# Altium PCB trace_8.PcbDoc
Units mil, origin at the board's own origin, x right, y up, seen from the top; angles counter-clockwise.
Board outline 2390 x 1760 mil, 2 copper layers (Top Layer, Bottom Layer); 2 components, 1 nets, 14 pads, 2 vias.
Unrouted connection lines stored in the file: 9.
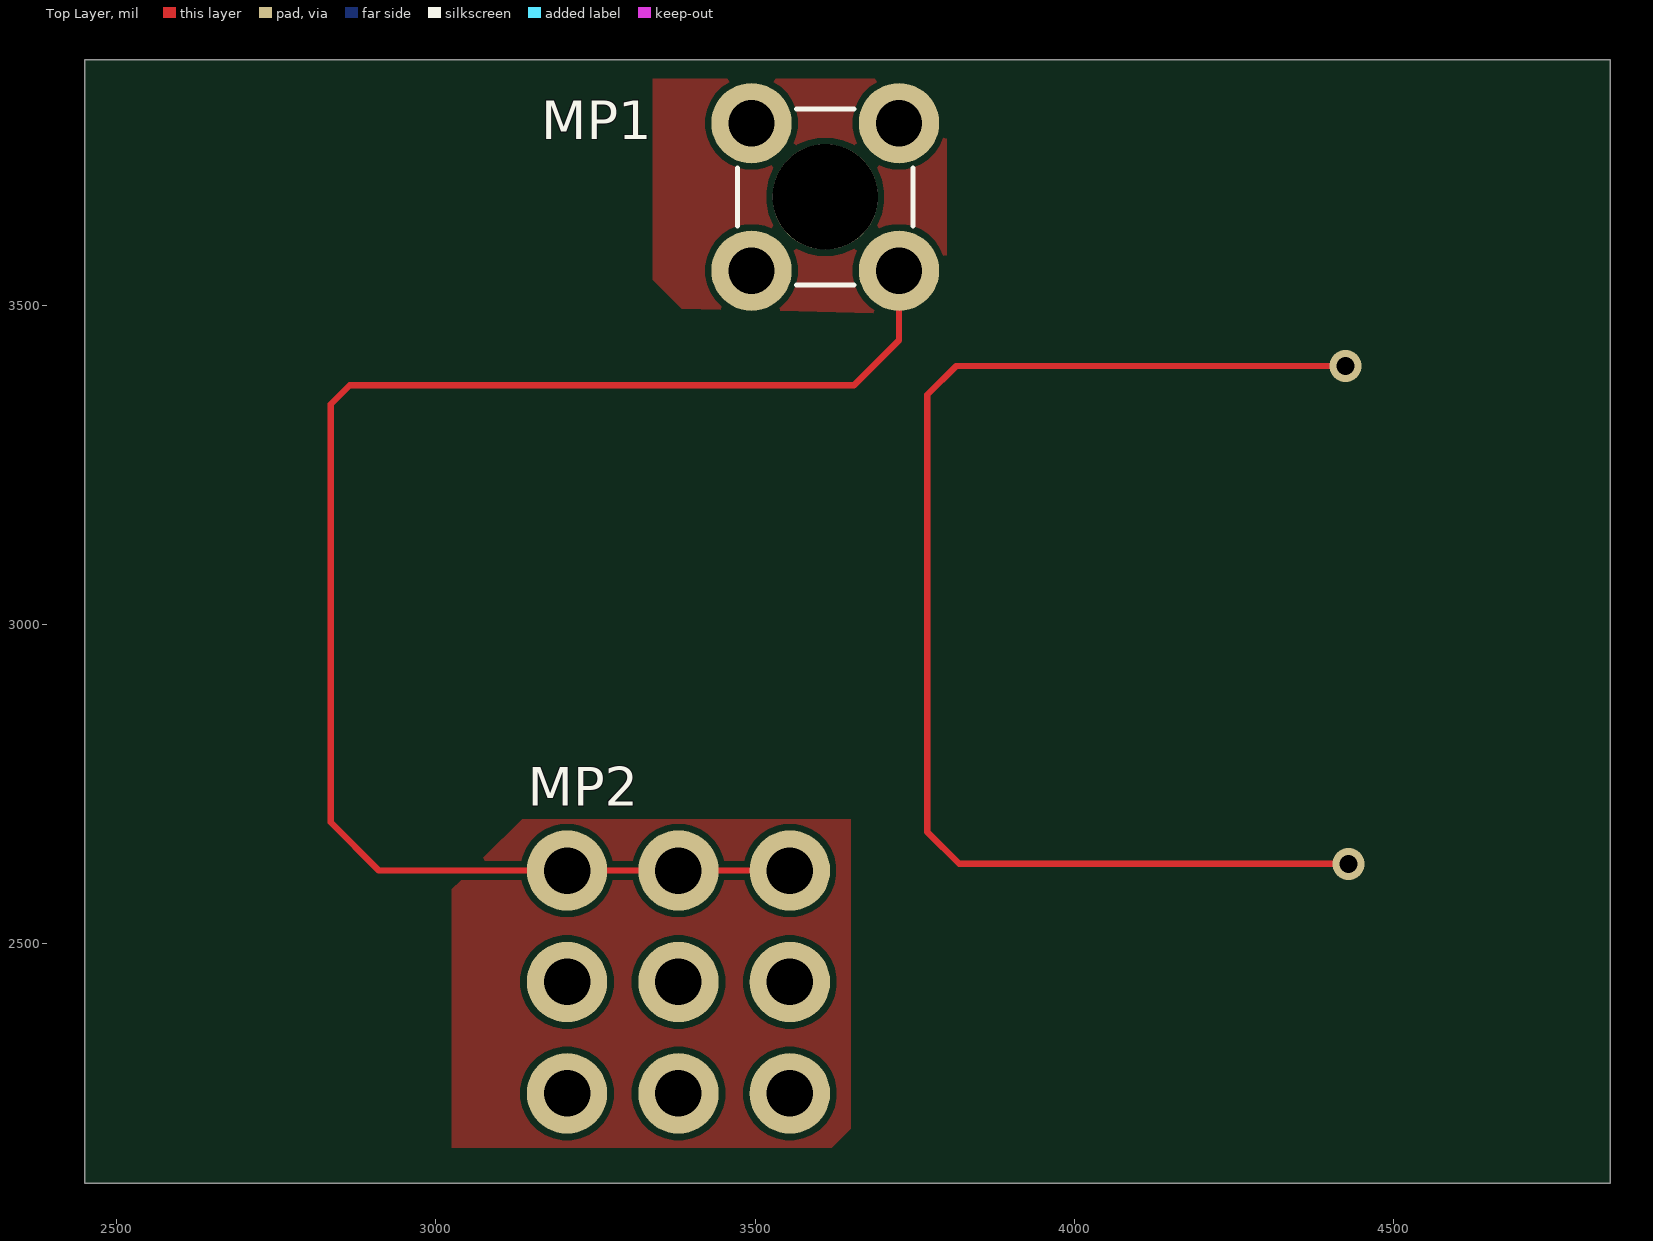
[diagram p0: Top Layer view]
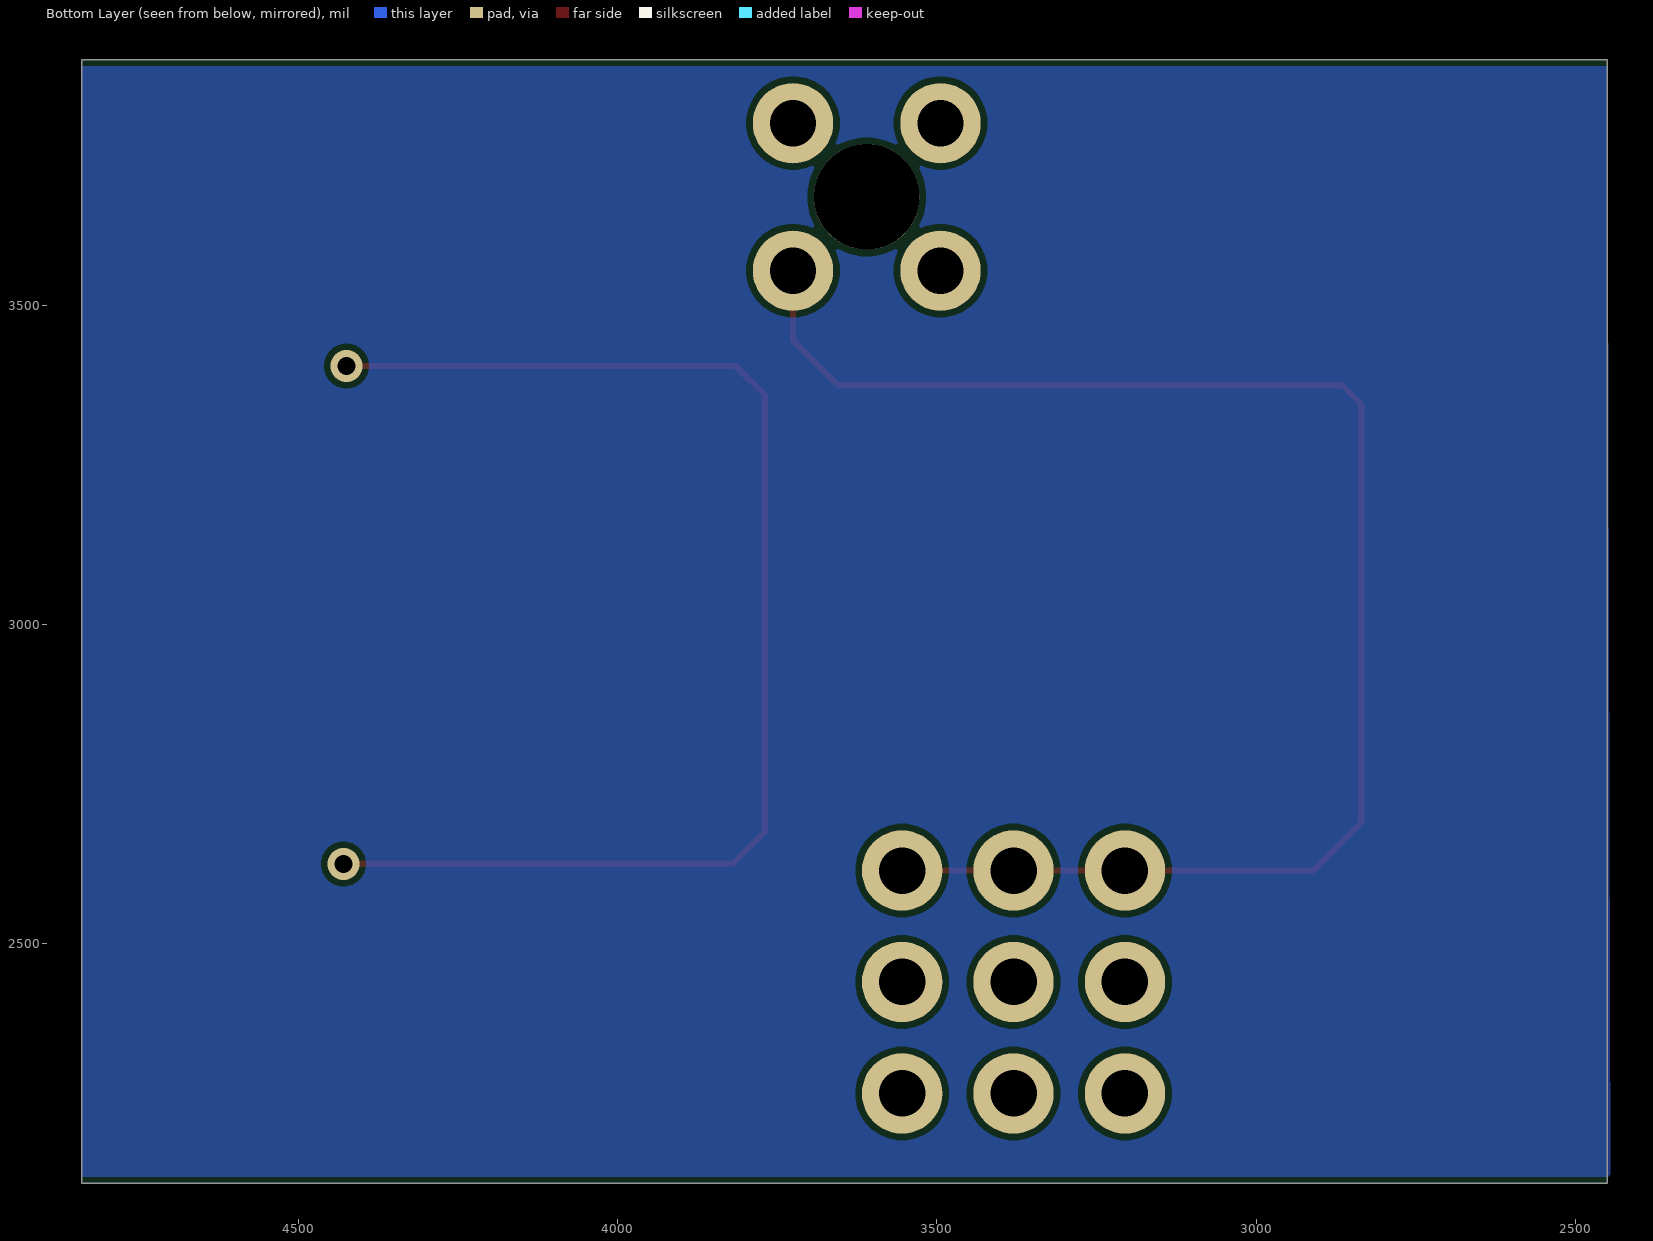
[diagram p1: Bottom Layer view, seen from below]

## Layer stack, top to bottom
Top Solder: solder mask 0.4, Solder Resist, Dk 3.5
Top Layer: signal copper 1.4
Dielectric 1: dielectric 12.6, FR-4, Dk 4.8
Bottom Layer: signal copper 1.4
Bottom Solder: solder mask 0.4, Solder Resist, Dk 3.5

## Board outline
2450,2125 4840,2125 4840,3885 2450,3885

## Design rules (kind name [scope] priority, off if disabled: settings)
Clearance [All] p1: gap=10 ignorepadtopadclearanceinfootprint=FALSE except(0: Arc-Hole Track-Hole SMDPad-Hole THPad-Hole Via-Hole Fill-Hole Poly-Hole Region-Hole Text-Hole)
PolygonConnect [All] p1: connectstyle=Relief reliefconductorwidth=10 reliefentries=4 polygonreliefangle="90 Angle" airgapwidth=10
RoutingVias [All] p1: holewidth=28 width=50 viastyle="Through Hole" minholewidth=28 minwidth=50 maxholewidth=28 maxwidth=50
SolderMaskExpansion [All] p1: expansion=4 istentingtop=FALSE
Width [All] p1: maxlimit=10 minlimit=10 preferedwidth=10
30 further rules are at their usual default settings.

## Components (designator, comment, footprint, x,y, rotation, side; value= is the part's Value field where it differs from the comment)
MP1 "74650074R" "WURTH 74650074" 3610,3670 r0 top
MP2 "74651194R" "WURTH 74651194" 3380,2440 r0 top

## Footprints (in the part's own frame and the unit in brackets; to place one, negate y for a bottom-side part, rotate by r counter-clockwise, add the part's x,y. Pads: shape width x height; smd on the part's side, far side on the other; paste and mask are expansions set on the pad)
"WURTH 74650074" [mm] "REDCUBE THR with internal thread, M4x2.5mm, through"
  round 3.2 hole 1.85: 1(-2.935,-2.935) 1(-2.935,2.935) 1(2.935,-2.935) 1(2.935,2.935)
  round 4.2 hole 4.2 unplated: MH1(0,0)
  silkscreen extent -3.5,-3.5 3.5,3.5, body extent -3.5,-3.5 3.5,3.5, height 3
"WURTH 74651194" [mm] "Shank, THR, 9 pins, 10x10mm, M4, thread 5mm"
  round 3.2 hole 1.85: 1(-4.435,-4.435) 1(-4.435,0) 1(-4.435,4.435) 1(0,-4.435) 1(0,0) 1(0,4.435) 1(4.435,-4.435) 1(4.435,0) 1(4.435,4.435)
  body extent -5,-5.01 5,4.99, height 9

## Part data
MP1: "TERM REDCUBE M4 4PIN PCB", Current Rating (Amps)="50 A", Manufacturer="Würth Elektronik", Supplier Part Number 1=732-10883-1-ND, ComponentLink1Description=Datasheet, ComponentLink1URL=https://katalog.we-online.de/em/datasheet/74650074R.pdf, ComponentLink2Description="DigiKey Link", ComponentLink2URL=https://www.digikey.com/en/products/detail/würth-elektronik/74650074R/6643979, Features="Screw not Included", lastupdated="07/08/2022 20:40:07", Lifecycle Status=Active, Minimum Order=1, Mounting Type="Through Hole", Number of Pins=4, Packaging=TapeAndReel, Part Number=74650074R, Part Status=Active, price=2.38, Screw Size=M4, Series="REDCUBE WP-THRBU", Supplier 1=DigiKey, Terminal Type="Screw Terminal, Power Tap", Termination=Solder
MP2: "TERM REDCUBE 9PIN PCB", Current Rating (Amps)="85 A", Manufacturer="Würth Elektronik", Supplier Part Number 1=732-10907-1-ND, ComponentLink1Description=Datasheet, ComponentLink1URL=https://katalog.we-online.de/em/datasheet/74651194R.pdf, ComponentLink2Description="DigiKey Link", ComponentLink2URL=https://www.digikey.com/en/products/detail/würth-elektronik/74651194R/6644003, lastupdated="07/08/2022 21:20:29", Lifecycle Status=Active, Minimum Order=1, Mounting Type="Through Hole", Number of Pins=9, Packaging=TapeAndReel, Part Number=74651194R, Part Status=Active, price=2.24, Series="REDCUBE WP-THRSH", Supplier 1=DigiKey, Terminal Type="Shank Terminal", Termination=Solder

## Via types
v1: diameter 50, hole 28, Top Layer to Bottom Layer, 2 vias

## Nets (pads, with @x,y where several pads share a name; then routed paths per layer and width w, separated by ;. In a path a pad name is that pad's centre, name@x,y a point inside that pad or via, vN(x,y) a via of type N, cw(c..) or ccw(c..) an arc to the next point about the centre after c; other vN are vias at no path point)
NetMP1_1: MP1.1 MP2.1 | length 2446.9
  Top Layer w10: MP2.1@3554.61,2614.61 3380,2614.61 3205.39,2614.61 2910.39,2614.61 2835,2690 2835,3345 2865,3375 3655,3375 3725.55,3445.55 MP1.1@3725.55,3554.45
pads on no net: MP1.MH1
copper on no net: | length 2039.4
  Top Layer w10: v1(4425,3405) 3815,3405 3770,3360 3770,2675 3820,2625 v1(4430,2625)

## Polygon pours and split planes (outlines as drawn)
no net on Bottom Layer "NONET_L02_P000" (solid, pour order 0): 2445,2135 4840,2135 4840,3875 2450,3875
no net on Top Layer "NONET_L01_P002" (solid, pour order 2): 3800,3485 3800,3835 3780,3855 3340,3855 3340,3540 3385,3495
no net on Top Layer "NONET_L01_P001" (solid, pour order 1): 3650,2205 3650,2695 3135,2695 3025,2585 3025,2180 3620,2180 3650,2210